# Altium PCB SDRdrum_Arty_RevB.PcbDoc
Units mm, origin at the board's own origin, x right, y up, seen from the top; angles counter-clockwise.
Board outline 100 x 90 mm, 4 copper layers (L1, L2 (GND), L3 (PWR), L4), stack 0.778 mm thick; 111 components, 58 nets, 399 pads, 48 vias.
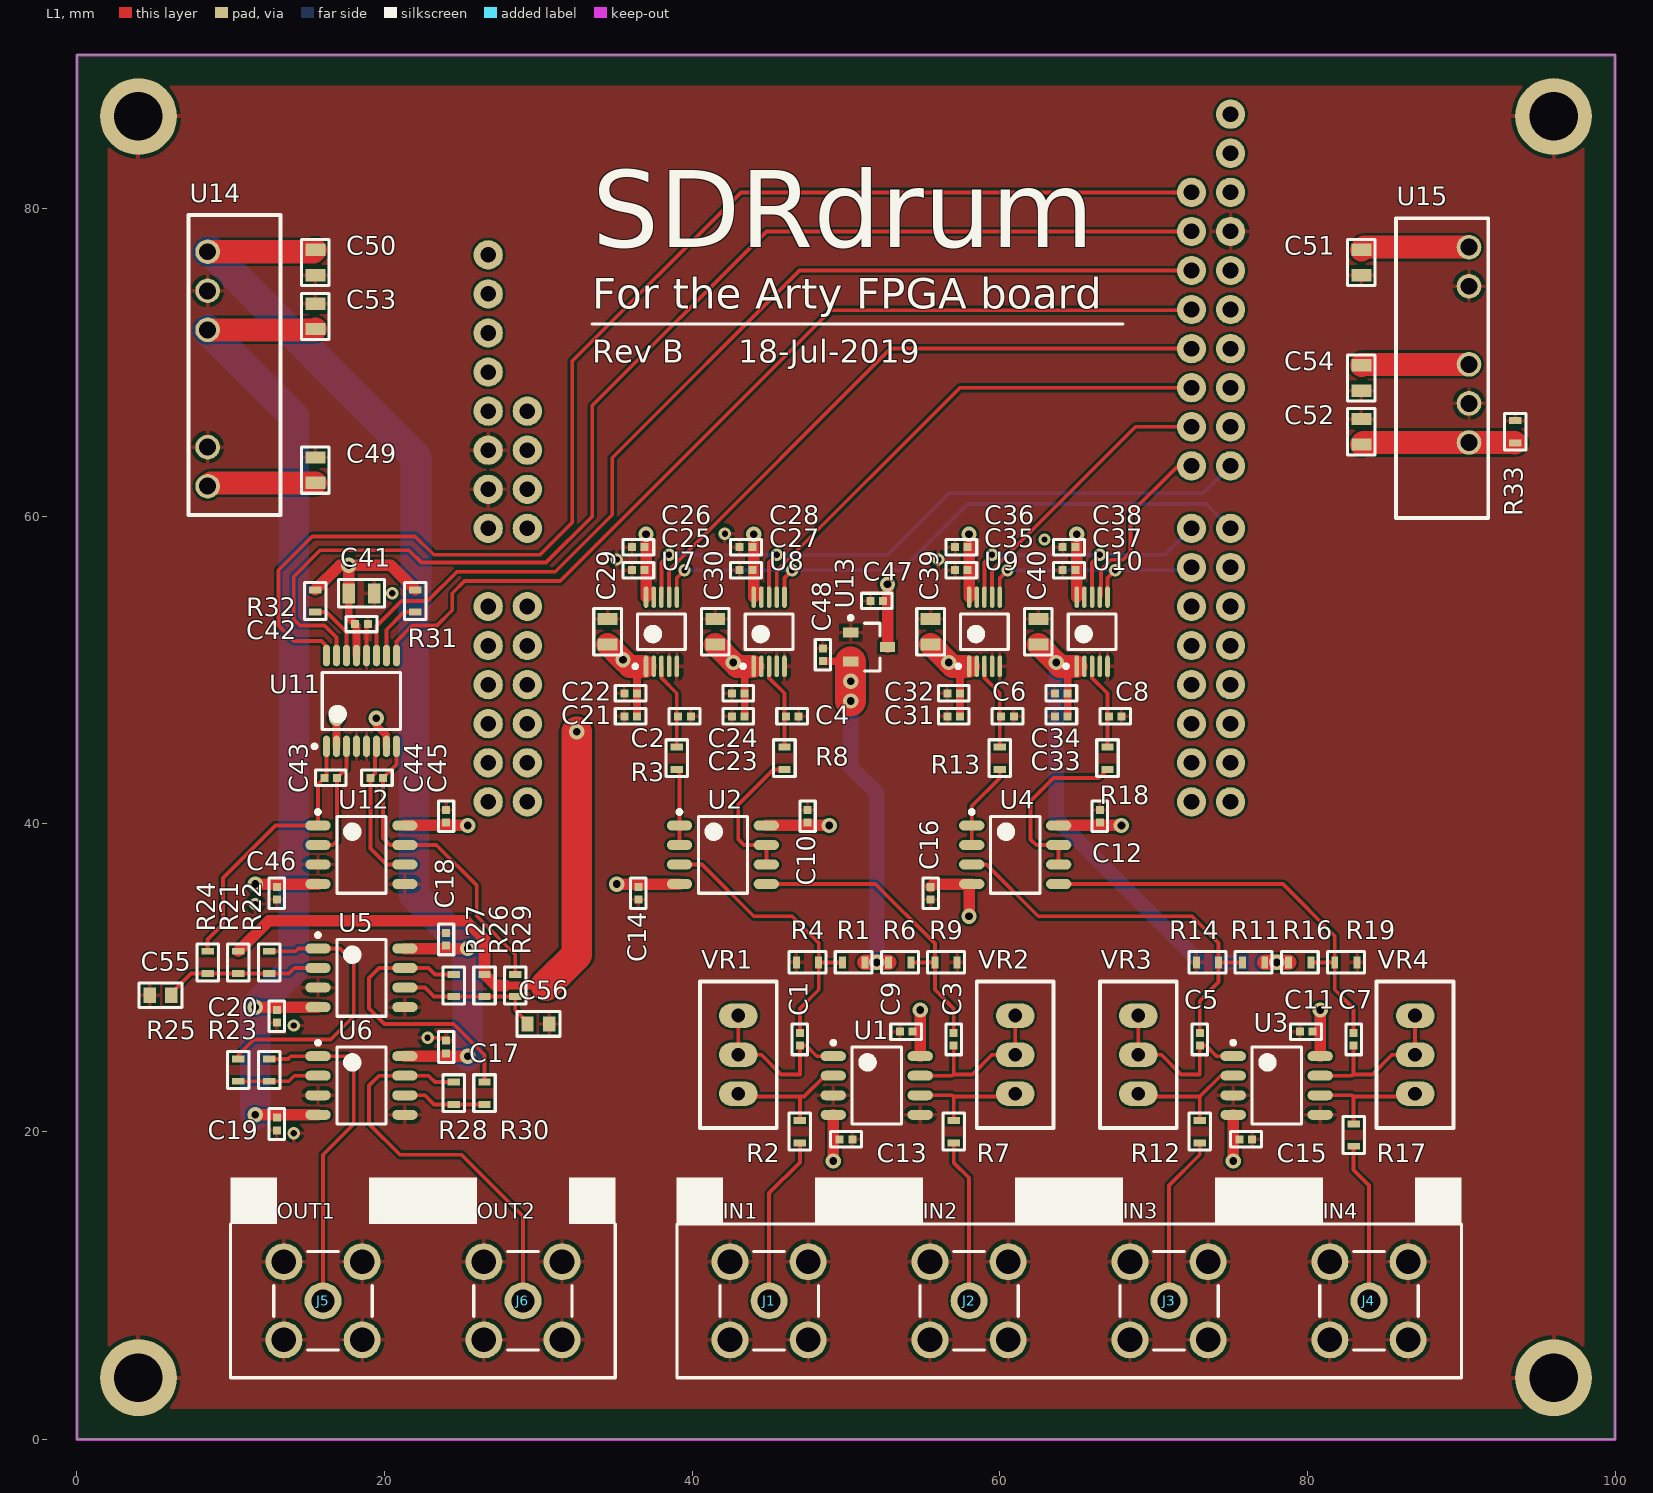
[diagram p0: L1 view]
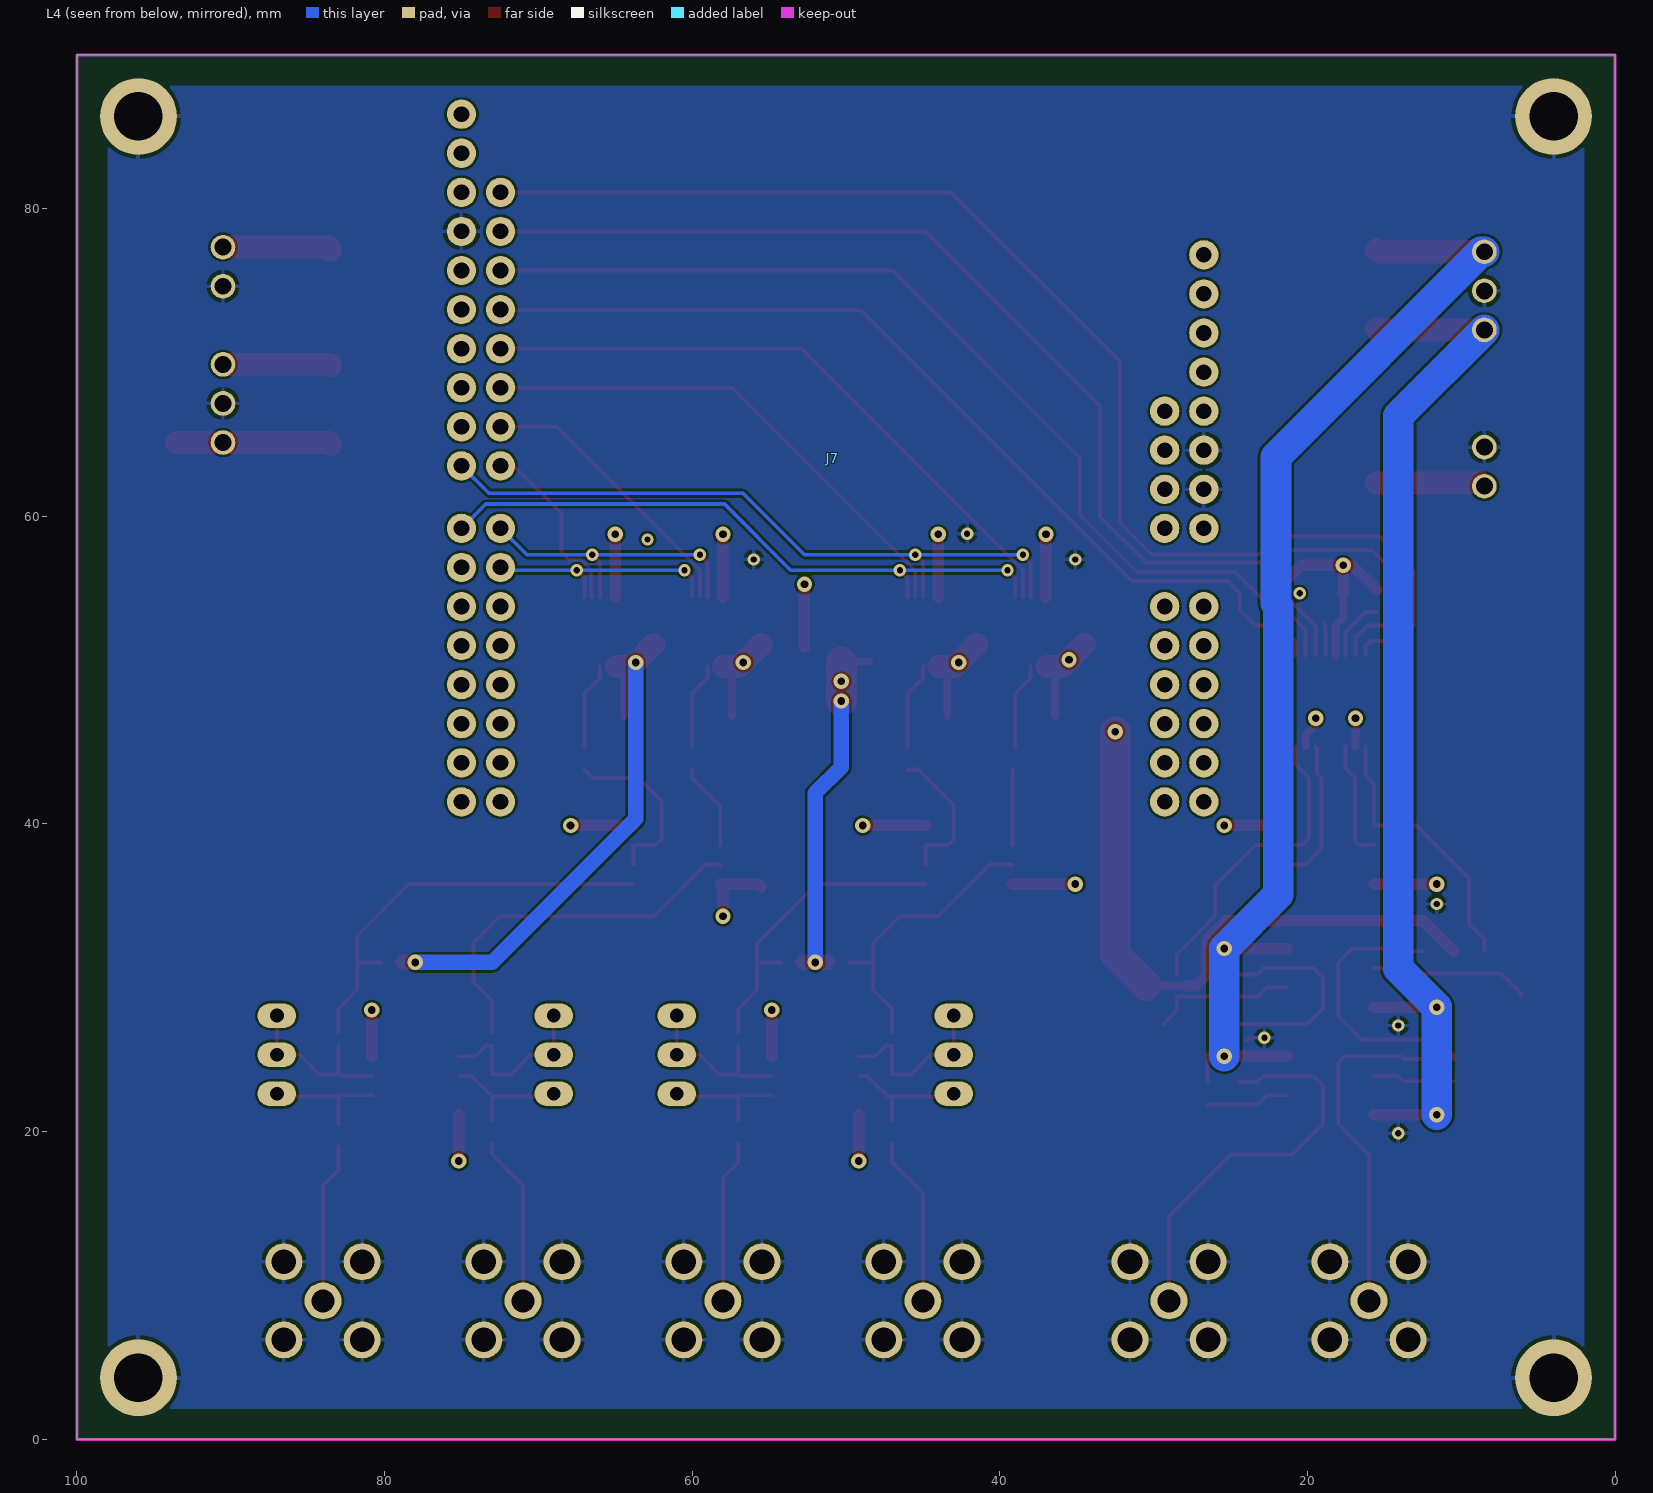
[diagram p1: L4 view, seen from below]
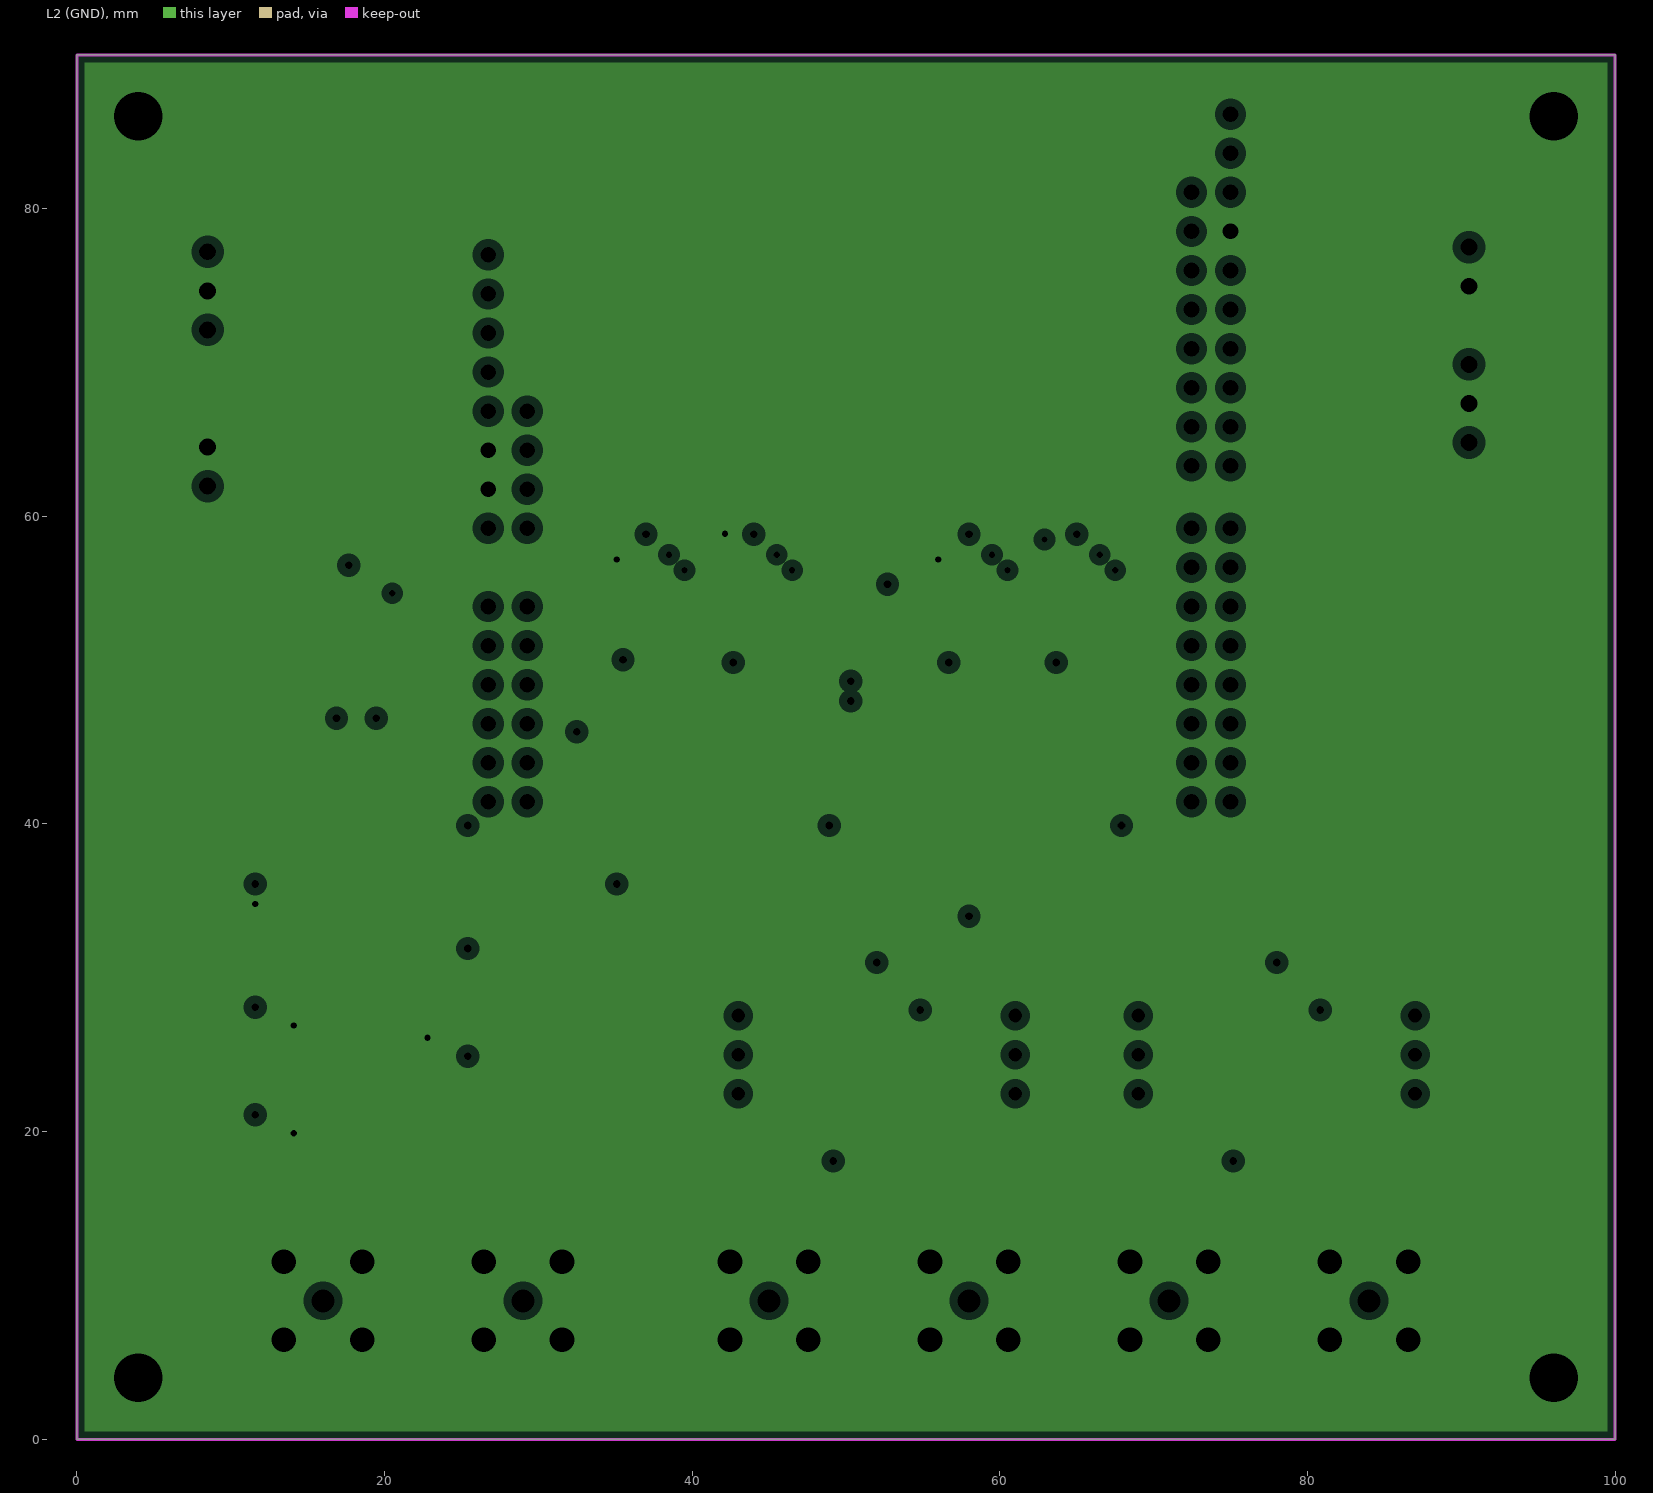
[diagram p2: L2 (GND), clearances drawn from the general rule]
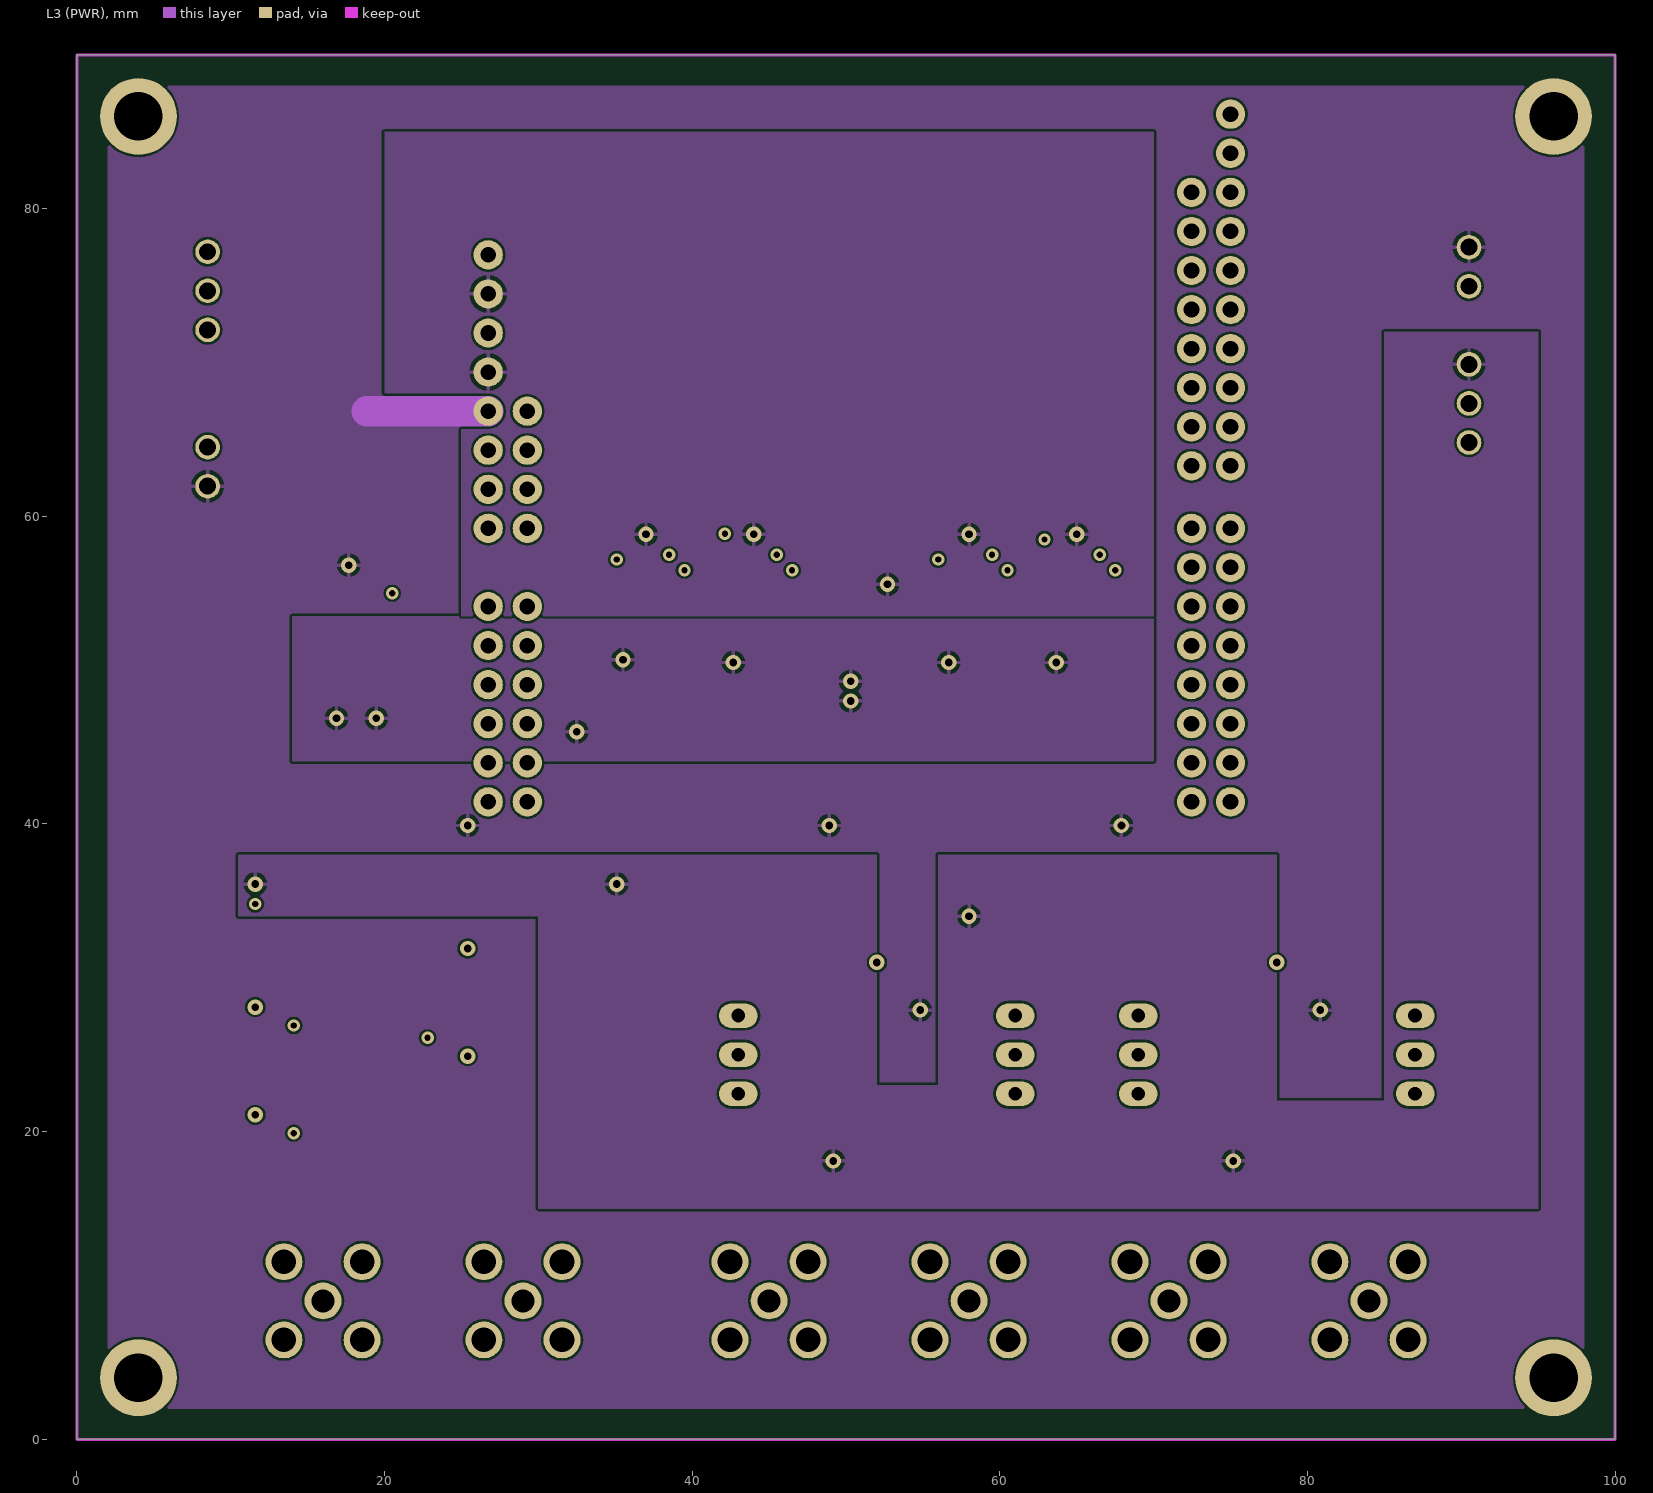
[diagram p3: L3 (PWR)]
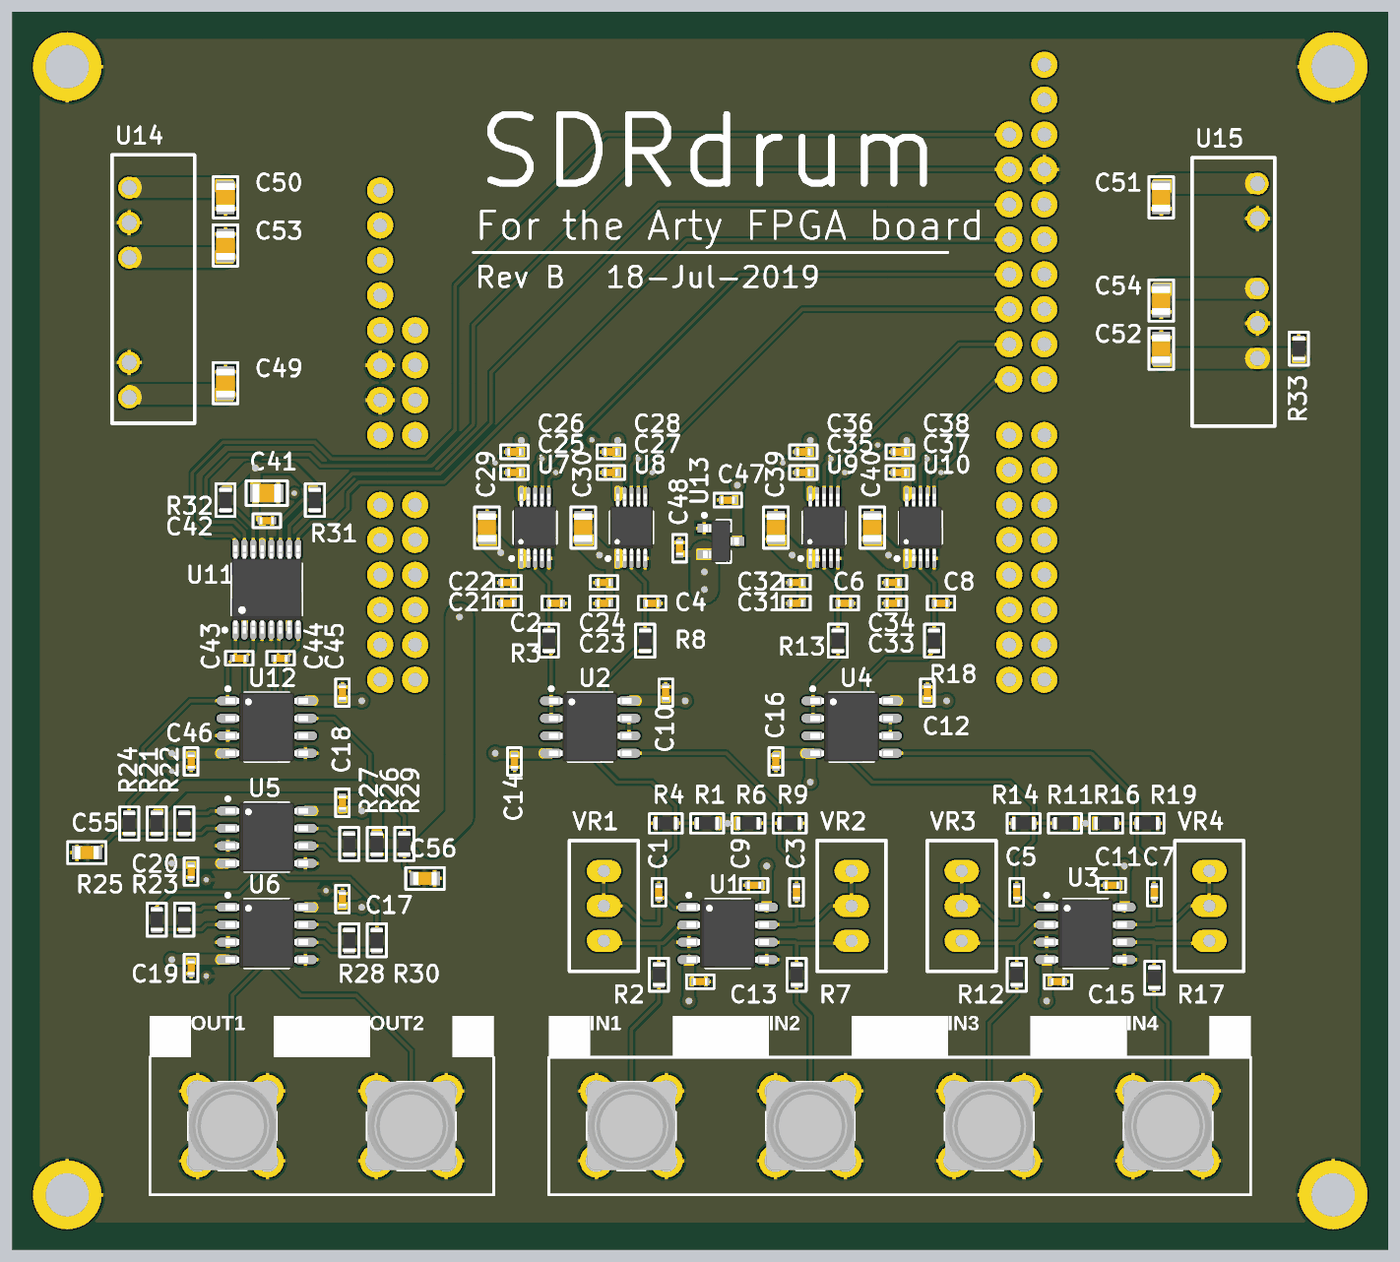
[diagram p4: 3D render of the assembled board from above, using the file's embedded part models]

## Layer stack, top to bottom
Top Solder: solder mask 0.0102, Solder Resist, Dk 3.5
L1: signal copper 0.0356
Dielectric 1: core 0.254, FR-4, Dk 4.2
L2 (GND): plane copper 0.036, net GND
Dielectric 3: core 0.254, Dk 4.2
L3 (PWR): signal copper 0.036
Dielectric 4: prepreg 0.127, Dk 4.2
L4: signal copper 0.0356
Bottom Solder: solder mask 0.0102, Solder Resist, Dk 3.5

## Board outline
0,0 100,0 100,90 0,90

## Design rules (kind name [scope] priority, off if disabled: settings)
Clearance [All] p1: gap=0.154 ignorepadtopadclearanceinfootprint=FALSE except(0: Arc-Hole Track-Hole SMDPad-Hole THPad-Hole Via-Hole Fill-Hole Poly-Hole Region-Hole Text-Hole)
Height [All] p1: minheight=0 maxheight=20 prefheight=12.7
HoleSize [All] p1: absolutevalues=TRUE maxlimit=4 minlimit=0.025 maxpercent=80.000 minpercent=20.000
MinimumSolderMaskSliver [All] p1: minsoldermaskwidth=0.05
PlaneClearance [All] p1: clearance=0.508
PlaneConnect [All] p1: planeconnectstyle=Relief reliefexpansion=0.508 reliefentries=4 reliefconductorwidth=0.254 reliefairgap=0.254
PolygonConnect [All] p1: connectstyle=Relief reliefconductorwidth=0.254 reliefentries=4 polygonreliefangle="90 Angle" airgapwidth=0.254
RoutingVias [All] p1: holewidth=0.711 width=1.27 viastyle="Through Hole" minholewidth=0.3 minwidth=0.6 maxholewidth=0.711 maxwidth=1.27
SilkToSilkClearance [All] p1: silktosilkclearance=0.1
SilkToSolderMaskClearance [IsPad] p1: minsilkscreentomaskgap=0.1 clearancetoexposedcopper=TRUE
SolderMaskExpansion [All] p1: expansion=0.102
Width [All] p1: maxlimit=2 minlimit=0.2 preferedwidth=0.254
23 further rules are at their usual default settings.

## Classes and differential pairs
component class ADCs: C21 C22 C23 C24 C25 C26 C27 C28 C29 C30 C31 C32 C33 C34 C35 C36 C37 C38 C39 C40 U7 U8 U9 U10
component class "Connectors and Mechanical": J7
component class DACs: C41 C42 C43 C44 C45 C46 R31 R32 U11 U12
component class Inputs: C1 C2 C3 C4 C5 C6 C7 C8 C9 C10 C11 C12 C13 C14 C15 C16 J1 J2 J3 J4 R1 R2 R3 R4 R6 R7 R8 R9 R11 R12 R13 R14 R16 R17 R18 R19 U1 U2 U3 U4 VR1 VR2 VR3 VR4
component class Outputs: C17 C18 C19 C20 C55 C56 J5 J6 R21 R22 R23 R24 R25 R26 R27 R28 R29 R30 U5 U6
component class Power: C47 C48 C49 C50 C51 C52 C53 C54 R33 U13 U14 U15

## Components (designator, comment, footprint, x,y, rotation, side; value= is the part's Value field where it differs from the comment)
C1 "Capacitor" CAP-0402-M 47,26 r90 top value=1µF
C2 "CAP 2200pF ±10% 25V 0402 X7R" CAP-0402-M 39.5,47 r180 top value=2200pF
C3 "Capacitor" CAP-0402-M 57,26 r90 top value=1µF
C4 "CAP 2200pF ±10% 25V 0402 X7R" CAP-0402-M 46.5,47 r180 top value=2200pF
C5 "Capacitor" CAP-0402-M 73,26 r90 top value=1µF
C6 "CAP 2200pF ±10% 25V 0402 X7R" CAP-0402-M 60.5,47 r180 top value=2200pF
C7 "Capacitor" CAP-0402-M 83,26 r90 top value=1µF
C8 "CAP 2200pF ±10% 25V 0402 X7R" CAP-0402-M 67.5,47 r180 top value=2200pF
C9 "Capacitor" CAP-0402-M 53.91,26.5 r180 top value=0.10µF
C10 "Capacitor" CAP-0402-M 47.5,40.5 r90 top value=0.10µF
C11 "Capacitor" CAP-0402-M 79.91,26.5 r180 top value=0.10µF
C12 "Capacitor" CAP-0402-M 66.5,40.5 r90 top value=0.10µF
C13 "Capacitor" CAP-0402-M 50,19.5 r0 top value=0.10µF
C14 "Capacitor" CAP-0402-M 36.5,35.5 r270 top value=0.10µF
C15 "Capacitor" CAP-0402-M 76,19.5 r0 top value=0.10µF
C16 "Capacitor" CAP-0402-M 55.5,35.5 r270 top value=0.10µF
C17 "Capacitor" CAP-0402-M 24,25.5 r90 top value=0.10µF
C18 "Capacitor" CAP-0402-M 24,32.5 r90 top value=0.10µF
C19 "Capacitor" CAP-0402-M 13,20.5 r270 top value=0.10µF
C20 "Capacitor" CAP-0402-M 13,27.5 r270 top value=0.10µF
C21 "Capacitor" CAP-0402-M 36,47 r180 top value=0.10µF
C22 "Capacitor" CAP-0402-M 36,48.5 r180 top value=1µF
C23 "Capacitor" CAP-0402-M 43,47 r180 top value=0.10µF
C24 "Capacitor" CAP-0402-M 43,48.5 r180 top value=1µF
C25 "Capacitor" CAP-0402-M 36.5,56.5 r180 top value=0.10µF
C26 "Capacitor" CAP-0402-M 36.5,58 r180 top value=1µF
C27 "Capacitor" CAP-0402-M 43.5,56.5 r180 top value=0.10µF
C28 "Capacitor" CAP-0402-M 43.5,58 r180 top value=1µF
C29 "Capacitor" CAP-0805-M 34.5,52.5 r270 top value=10µF
C30 "Capacitor" CAP-0805-M 41.5,52.5 r270 top value=10µF
C31 "Capacitor" CAP-0402-M 57,47 r180 top value=0.10µF
C32 "Capacitor" CAP-0402-M 57,48.5 r180 top value=1µF
C33 "Capacitor" CAP-0402-M 64,47 r180 top value=0.10µF
C34 "Capacitor" CAP-0402-M 64,48.5 r180 top value=1µF
C35 "Capacitor" CAP-0402-M 57.5,56.5 r180 top value=0.10µF
C36 "Capacitor" CAP-0402-M 57.5,58 r180 top value=1µF
C37 "Capacitor" CAP-0402-M 64.5,56.5 r180 top value=0.10µF
C38 "Capacitor" CAP-0402-M 64.5,58 r180 top value=1µF
C39 "Capacitor" CAP-0805-M 55.5,52.5 r270 top value=10µF
C40 "Capacitor" CAP-0805-M 62.5,52.5 r270 top value=10µF
C41 "Capacitor" CAP-0805-M 18.5,55 r180 top value=10µF
C42 "Capacitor" CAP-0402-M 18.5,53 r0 top value=0.10µF
C43 "CAP 6.8pF ±0.5pF 50V 0402 C0G, NP0" CAP-0402-M 16.5,43 r180 top value=6.8pF
C44 "CAP 6.8pF ±0.5pF 50V 0402 C0G, NP0" CAP-0402-M 19.5,43 r0 top value=6.8pF
C45 "Capacitor" CAP-0402-M 24,40.5 r90 top value=0.10µF
C46 "Capacitor" CAP-0402-M 13,35.5 r270 top value=0.10µF
C47 "Capacitor" CAP-0402-M 52,54.5 r180 top value=1µF
C48 "Capacitor" CAP-0402-M 48.5,51 r90 top value=1µF
C49 "Capacitor" CAP-0805-M 15.5,63 r270 top value=10µF
C50 "CAP 220nF ±10% 25V 0805 X7R" CAP-0805-M 15.5,76.5 r90 top value=220nF
C51 "Capacitor" CAP-0805-M 83.5,76.5 r90 top value=10µF
C52 "CAP 220nF ±10% 25V 0805 X7R" CAP-0805-M 83.5,65.5 r270 top value=220nF
C53 "CAP 220nF ±10% 25V 0805 X7R" CAP-0805-M 15.5,73 r270 top value=220nF
C54 "CAP 220nF ±10% 25V 0805 X7R" CAP-0805-M 83.5,69 r90 top value=220nF
C55 "CAP 100pF ±5% 50V 0603 C0G, NP0" CAP-0603-M 5.427,28.873 r0 top value=100pF
C56 "CAP 100pF ±5% 50V 0603 C0G, NP0" CAP-0603-M 30,27 r180 top value=100pF
J1 "5-1814832-1" 5-1814832-1 45,9 r0 top
J2 "5-1814832-1" 5-1814832-1 58,9 r0 top
J3 "5-1814832-1" 5-1814832-1 71,9 r0 top
J4 "5-1814832-1" 5-1814832-1 84,9 r0 top
J5 "5-1814832-1" 5-1814832-1 16,9 r0 top
J6 "5-1814832-1" 5-1814832-1 29,9 r0 top
J7 "ARTY" ARTY-TH 93,34 r270 bottom locked
R1 "RES 10K 1% 1/10 W 0603 ±100ppm/°C" RES-0603-M 50.5,31 r0 top value=10K
R2 "Resistor" RES-0603-M 47,20 r270 top value=1K
R3 "RES 330R 1% 1/10 W 0603 ±100ppm/°C" RES-0603-M 39,44.275 r90 top value=330R
R4 "RES 10K 1% 1/10 W 0603 ±100ppm/°C" RES-0603-M 47.5,31 r0 top value=10K
R6 "RES 10K 1% 1/10 W 0603 ±100ppm/°C" RES-0603-M 53.5,31 r180 top value=10K
R7 "Resistor" RES-0603-M 57,20 r270 top value=1K
R8 "RES 330R 1% 1/10 W 0603 ±100ppm/°C" RES-0603-M 46,44.275 r90 top value=330R
R9 "RES 10K 1% 1/10 W 0603 ±100ppm/°C" RES-0603-M 56.5,31 r180 top value=10K
R11 "RES 10K 1% 1/10 W 0603 ±100ppm/°C" RES-0603-M 76.5,31 r0 top value=10K
R12 "Resistor" RES-0603-M 73,20 r270 top value=1K
R13 "RES 330R 1% 1/10 W 0603 ±100ppm/°C" RES-0603-M 60,44.275 r90 top value=330R
R14 "RES 10K 1% 1/10 W 0603 ±100ppm/°C" RES-0603-M 73.5,31 r0 top value=10K
R16 "RES 10K 1% 1/10 W 0603 ±100ppm/°C" RES-0603-M 79.5,31 r180 top value=10K
R17 "Resistor" RES-0603-M 83,19.775 r270 top value=1K
R18 "RES 330R 1% 1/10 W 0603 ±100ppm/°C" RES-0603-M 67,44.275 r90 top value=330R
R19 "RES 10K 1% 1/10 W 0603 ±100ppm/°C" RES-0603-M 82.5,31 r180 top value=10K
R21 "RES 10K 1% 1/10 W 0603 ±100ppm/°C" RES-0603-M 10.5,31 r90 top value=10K
R22 "RES 10K 1% 1/10 W 0603 ±100ppm/°C" RES-0603-M 12.5,31 r90 top value=10K
R23 "RES 4K02 1% 1/10 W 0603 ±100ppm/°C" RES-0603-M 12.5,24 r90 top value=4K02
R24 "RES 4K99 1% 1/10 W 0603 ±100ppm/°C" RES-0603-M 8.5,31 r270 top value=4K99
R25 "RES 1K 1% 1/10 W 0603 ±100ppm/°C" RES-0603-M 10.5,24 r270 top value=1K
R26 "RES 10K 1% 1/10 W 0603 ±100ppm/°C" RES-0603-M 26.5,29.5 r90 top value=10K
R27 "RES 10K 1% 1/10 W 0603 ±100ppm/°C" RES-0603-M 24.5,29.5 r90 top value=10K
R28 "RES 4K02 1% 1/10 W 0603 ±100ppm/°C" RES-0603-M 24.5,22.5 r90 top value=4K02
R29 "RES 4K99 1% 1/10 W 0603 ±100ppm/°C" RES-0603-M 28.5,29.5 r270 top value=4K99
R30 "RES 1K 1% 1/10 W 0603 ±100ppm/°C" RES-0603-M 26.5,22.5 r270 top value=1K
R31 "Resistor" RES-0603-M 22,54.5 r270 top value=1K
R32 "Resistor" RES-0603-M 15.5,54.5 r270 top value=1K
R33 "RES 499R 1% 1/10 W 0603 ±100ppm/°C" RES-0603-M 93.5,65.5 r90 top value=499R
U1 "TLC082" SOIC127P600X175-8M 52,23 r0 top
U2 "TLC082" SOIC127P600X175-8M 42,38 r0 top
U3 "TLC082" SOIC127P600X175-8M 78,23 r0 top
U4 "TLC082" SOIC127P600X175-8M 61,38 r0 top
U5 "TLC082" SOIC127P600X175-8M 18.5,30 r0 top
U6 "TLC082" SOIC127P600X175-8M 18.5,23 r0 top
U7 "AD7980ARMZ" TSSOP50P490X110-10N 38,52.5 r90 top
U8 "AD7980ARMZ" TSSOP50P490X110-10N 45,52.5 r90 top
U9 "AD7980ARMZ" TSSOP50P490X110-10N 59,52.5 r90 top
U10 "AD7980ARMZ" TSSOP50P490X110-10N 66,52.5 r90 top
U11 "AD5545" TSOP65P640X120-16N 18.5,48 r90 top
U12 "LT1678" SOIC127P600X175-8M 18.5,38 r0 top
U13 "MCP1700T-2502E/TT" SOT65P237X110-3N 51.5,51.5 r0 top
U14 "CMR0515S3C" CMR-3C 8.5,61.96 r90 top
U15 "PDM1-S5-D5-S" PDM-1S 90.5,77.5 r270 top
VR1 "PV36W204C01B00" PV36W 43,25 r90 top value=200k
VR2 "PV36W204C01B00" PV36W 61,25 r90 top value=200k
VR3 "PV36W204C01B00" PV36W 69,25 r90 top value=200k
VR4 "PV36W204C01B00" PV36W 87,25 r90 top value=200k

## Footprints (in the part's own frame and the unit in brackets; to place one, negate y for a bottom-side part, rotate by r counter-clockwise, add the part's x,y. Pads: shape width x height; smd on the part's side, far side on the other; paste and mask are expansions set on the pad)
5-1814832-1 [mm]
  round 2.4 hole 1.5: 1(0,0)
  round 2.4 hole 1.6: MH(-2.54,-2.54) MH(-2.54,2.54) MH(2.54,-2.54) MH(2.54,2.54)
  silkscreen extent -3.2,-3.2 3.2,3.2, body extent -3.2,-3.2 3.2,3.2, height 9.5
ARTY-TH [mm]
  round 1.905 hole 1.016: 1(-43,66.26) 2(-40.46,66.26) 3(-37.92,66.26) 4(-35.38,66.26) 5(-32.84,66.26) 6(-30.3,66.26) 7(-27.76,66.26) 8(-25.22,66.26) 9(-20.14,66.26) 10(-17.6,66.26) 11(-15.06,66.26) 12(-12.52,66.26) 13(-9.98,66.26) 14(-7.44,66.26) 15(-32.84,63.72) 16(-30.3,63.72) 17(-27.76,63.72) 18(-25.22,63.72) 19(-20.14,63.72) 20(-17.6,63.72) 21(-15.06,63.72) 22(-12.52,63.72) 23(-9.98,63.72) 24(-7.44,63.72) 25(-47.064,20.54) 26(-44.524,20.54) 27(-41.984,20.54) 28(-39.444,20.54) 29(-36.904,20.54) 30(-34.364,20.54) 31(-31.824,20.54) 32(-29.284,20.54) 33(-25.22,20.54) 34(-22.68,20.54) 35(-20.14,20.54) 36(-17.6,20.54) 37(-15.06,20.54) 38(-12.52,20.54) 39(-9.98,20.54) 40(-7.44,20.54) 41(-52.144,18) 42(-49.604,18) 43(-47.064,18) 44(-44.524,18) 45(-41.984,18) 46(-39.444,18) 47(-36.904,18) 48(-34.364,18) 49(-31.824,18) 50(-29.284,18) 51(-25.22,18) 52(-22.68,18) 53(-20.14,18) 54(-17.6,18) 55(-15.06,18) 56(-12.52,18) 57(-9.98,18) 58(-7.44,18)
CAP-0402-M [mm] "Chip Capacitor, 2-Leads, Body 1.00x0.50mm, IPC High Density"
  rect 0.52x0.52 smd: 1(-0.41,0) 2(0.41,0)
  silkscreen extent -1,-0.5 1,0.5, body extent -0.53,-0.28 0.53,0.28, height 0.55
CAP-0603-M [mm] "Chip Capacitor, 2-Leads, Body 1.60x0.80mm, IPC Medium Density"
  rect 0.8x1 smd: 1(-0.7,0) 2(0.7,0)
  silkscreen extent -1.4,-0.8 1.4,0.8, body extent -0.87,-0.48 0.87,0.48, height 0.9
CAP-0805-M [mm] "Chip Capacitor, 2-Leads, Body 2.00x1.25mm, IPC High Density"
  rect 0.8x1.3 smd: 1(-0.825,0) 2(0.825,0)
  silkscreen extent -1.5,-0.9 1.5,0.9, body extent -1.05,-0.67 1.05,0.67, height 1.35
CMR-3C [mm]
  round 1.6 hole 1.1: 1(0,0) 2(2.54,0) 3(10.16,0) 4(12.7,0) 5(15.24,0)
  silkscreen extent -1.88,-4.75 17.62,1.25, body extent -2,-4.75 17.62,1.25, height 10
PDM-1S [mm]
  round 1.6 hole 1.1: 1(0,0) 2(2.54,0) 3(7.62,0) 4(10.16,0) 5(12.7,0)
  silkscreen extent -1.88,-4.75 17.62,1.25, body extent -2,-4.75 17.62,1.25, height 10
PV36W [mm]
  oval 1.6x2.5 hole 0.9: 1(-2.54,0) 2(0,0) 3(2.54,0)
  silkscreen extent -4.75,-2.5 4.75,2.5, body extent -4.75,-2.5 4.75,2.5, height 10
RES-0603-M [mm] "Chip Resistor, 2-Leads, Body 1.60x0.80mm, IPC High Density"
  rect 0.45x0.8 smd: 1(-0.725,0) 2(0.725,0)
  silkscreen extent -1.2,-0.7 1.2,0.7, body extent -0.85,-0.45 0.85,0.45, height 0.55
SOIC127P600X175-8M [mm] "SOIC, 8-Leads, Body 4.90x3.90mm, Pitch 1.27mm, IPC Low Density"
  oval 1.65x0.65 smd: 1(-2.825,1.905) 2(-2.825,0.635) 3(-2.825,-0.635) 4(-2.825,-1.905) 5(2.825,-1.905) 6(2.825,-0.635) 7(2.825,0.635) 8(2.825,1.905)
  silkscreen extent -2.95,-2.5 1.6,2.9, body extent -3,-2.5 3,2.5, height 1.75
SOT65P237X110-3N [mm] "SOT23, 3-Leads, Body 2.86x2.37mm, Pitch 0.65mm, IPC Medium Density"
  rect 1x0.65 smd: 1(-1.2,0.95) 2(-1.2,-0.95) 3(1.2,0)
  silkscreen extent -1.32,-1.55 0.7,2.02, body extent -1.32,-1.53 1.32,1.53, height 1.1
TSOP65P640X120-16N [mm] "TSOP, 16-Leads, Body 5.00x4.40mm, Pitch 0.65mm, IPC Medium Density"
  oval 1.4x0.45 smd: 1(-2.95,2.275) 2(-2.95,1.625) 3(-2.95,0.975) 4(-2.95,0.325) 5(-2.95,-0.325) 6(-2.95,-0.975) 7(-2.95,-1.625) 8(-2.95,-2.275) 9(2.95,-2.275) 10(2.95,-1.625) 11(2.95,-0.975) 12(2.95,-0.325) 13(2.95,0.325) 14(2.95,0.975) 15(2.95,1.625) 16(2.95,2.275)
  silkscreen extent -3.07,-2.55 1.85,3.17, body extent -3.2,-2.55 3.2,2.55, height 1.2
TSSOP50P490X110-10N [mm] "TSSOP, 10-Leads, Body 3.00x3.00mm, Pitch 0.50mm, IPC Medium Density"
  oval 1.4x0.3 smd: 1(-2.25,1) 2(-2.25,0.5) 3(-2.25,0) 4(-2.25,-0.5) 5(-2.25,-1) 6(2.25,-1) 7(2.25,-0.5) 8(2.25,0) 9(2.25,0.5) 10(2.25,1)
  silkscreen extent -2.37,-1.55 1.15,1.82, body extent -2.45,-1.55 2.45,1.55, height 1.1

## Part data
C1 C3 C5 C7 C22 C24 C26 C28 C32 C34 C36 C38 C47 C48: library part CC0402KRX5R6BB105, Manufacturer=Yageo, Manufacturer Series=CC, Package=0402, Supplier Part Number 1=311-1439-1-ND, Temperature Coefficient=X5R, Temperature Range="-55°C ~ 85°C", Tolerance=±10%, Voltage=10V, Component Type=Standard, Part Number=CC0402KRX5R6BB105, Supplier 1=Digi-Key
C2 C4 C6 C8: library part CC0402KRX7R8BB222, Manufacturer=Yageo, Manufacturer Series=CC, Package=0402, Supplier Part Number 1=311-1714-1-ND, Temperature Coefficient=X7R, Temperature Range="-55°C ~ 125°C", Tolerance=±10%, Voltage=25V, Component Type=Standard, Part Number=CC0402KRX7R8BB222, Supplier 1=Digi-Key
C9 C10 C11 C12 C13 C14 C15 C16 C17 C18 C19 C20 C21 C23 C25 C27 C31 C33 C35 C37 C42 C45 C46: library part CC0402KRX5R6BB104, Manufacturer=Yageo, Manufacturer Series=CC, Package=0402, Supplier Part Number 1=311-1336-1-ND, Temperature Coefficient=X5R, Temperature Range="-55°C ~ 85°C", Tolerance=±10%, Voltage=10V, Component Type=Standard, Part Number=CC0402KRX5R6BB104, Supplier 1=Digi-Key
C29 C30 C39 C40 C41 C49 C51: library part CC0805KKX5R6BB106, Manufacturer=Yageo, Manufacturer Series=CC, Package=0805, Supplier Part Number 1=311-1460-1-ND, Temperature Coefficient=X5R, Temperature Range="-55°C ~ 85°C", Tolerance=±10%, Voltage=10V, Component Type=Standard, Part Number=CC0805KKX5R6BB106, Supplier 1=Digi-Key
C43 C44: library part CC0402DRNPO9BN6R8, Manufacturer=Yageo, Manufacturer Series=CC, Package=0402, Supplier Part Number 1=311-1637-1-ND, Temperature Coefficient="C0G, NP0", Temperature Range="-55°C ~ 125°C", Tolerance=±0.5pF, Voltage=50V, Component Type=Standard, Part Number=CC0402DRNPO9BN6R8, Supplier 1=Digi-Key
C50 C52 C53 C54: library part CC0805KRX7R8BB224, Manufacturer=Yageo, Manufacturer Series=CC, Package=0805, Supplier Part Number 1=311-1432-1-ND, Temperature Coefficient=X7R, Temperature Range="-55°C ~ 125°C", Tolerance=±10%, Voltage=25V, Component Type=Standard, Part Number=CC0805KRX7R8BB224, Supplier 1=Digi-Key
C55 C56: library part CC0603JRNPO9BN101, Manufacturer=Yageo, Manufacturer Series=CC, Package=0603, Supplier Part Number 1=311-1069-1-ND, Temperature Coefficient="C0G, NP0", Temperature Range="-55°C ~ 125°C", Tolerance=±5%, Voltage=50V, Component Type=Standard, Part Number=CC0603JRNPO9BN101, Supplier 1=Digi-Key
R1 R4 R6 R9 R11 R14 R16 R19 R21 R22 R26 R27: library part RC0603FR-0710KL, Manufacturer=Yageo, Manufacturer Series=RC, Package=0603, Power="1/10 W", Supplier Part Number 1=311-10.0KHRCT-ND, Temperature Coefficient=±100ppm/°C, Temperature Range="-55°C ~ 155°C", Tolerance=1%, Component Type=Standard, Part Number=RC0603FR-0710KL, Supplier 1=Digi-Key
R2 R7 R12 R17 R25 R30 R31 R32: library part RC0603FR-071KL, Manufacturer=Yageo, Manufacturer Series=RC, Package=0603, Power="1/10 W", Supplier Part Number 1=311-1.00KHRCT-ND, Temperature Coefficient=±100ppm/°C, Temperature Range="-55°C ~ 155°C", Tolerance=1%, Component Type=Standard, Part Number=RC0603FR-071KL, Supplier 1=Digi-Key
R3 R8 R13 R18: library part RC0603FR-07330RL, Manufacturer=Yageo, Manufacturer Series=RC, Package=0603, Power="1/10 W", Supplier Part Number 1=311-330HRCT-ND, Temperature Coefficient=±100ppm/°C, Temperature Range="-55°C ~ 155°C", Tolerance=1%, Component Type=Standard, Part Number=RC0603FR-07330RL, Supplier 1=Digi-Key
R23 R28: library part RC0603FR-074K02L, Manufacturer=Yageo, Manufacturer Series=RC, Package=0603, Power="1/10 W", Supplier Part Number 1=311-4.02KHRCT-ND, Temperature Coefficient=±100ppm/°C, Temperature Range="-55°C ~ 155°C", Tolerance=1%, Component Type=Standard, Part Number=RC0603FR-074K02L, Supplier 1=Digi-Key
R24 R29: library part RC0603FR-074K99L, Manufacturer=Yageo, Manufacturer Series=RC, Package=0603, Power="1/10 W", Supplier Part Number 1=311-4.99KHRCT-ND, Temperature Coefficient=±100ppm/°C, Temperature Range="-55°C ~ 155°C", Tolerance=1%, Component Type=Standard, Part Number=RC0603FR-074K99L, Supplier 1=Digi-Key
R33: library part RC0603FR-07499RL, Manufacturer=Yageo, Manufacturer Series=RC, Package=0603, Power="1/10 W", Supplier Part Number 1=311-499HRCT-ND, Temperature Coefficient=±100ppm/°C, Temperature Range="-55°C ~ 155°C", Tolerance=1%, Component Type=Standard, Part Number=RC0603FR-07499RL, Supplier 1=Digi-Key
U1 U2 U3 U4 U5 U6: "36-V, PrOperational Amplifiers, 8-Pin SOIC"
U11: "Dual, Current-Output, Serial-Input, 16-Bit DAC, 16-Pin TSSOP", Supplier Part Number 1=AD5545BRUZ-ND, Supplier 1=Digi-Key
U12: "Dual/Quad Low Noise, Rail-to-Rail, Precision Op Amps, 8-Pin SOIC", Supplier Part Number 1=LT1678CS8#PBF-ND, Supplier 1=Digi-Key
U13: Supplier Part Number 1=MCP1700T-2502E/TTCT-ND, Supplier 1=Digi-Key
U14: Supplier Part Number 1=811-2900-5-ND, Supplier 1=Digi-Key
VR1 VR2 VR3 VR4: "Potentiometer, 200 k, 10%, 0.5 W, Through Hole", Supplier Part Number 1=490-2882-ND, Supplier 1=Digi-Key

## Free pads (board coordinates)
  round 5 hole 3.15: 0(4,4) 0(4,86) 0(96,4) 0(96,86)

## Via types
v1: diameter 1, hole 0.5, L1 to L4, tented both sides, 31 vias
v2: diameter 0.8, hole 0.4, L1 to L4, tented both sides, 17 vias

## Nets (pads, with @x,y where several pads share a name; then routed paths per layer and width w, separated by ;. In a path a pad name is that pad's centre, name@x,y a point inside that pad or via, vN(x,y) a via of type N, cw(c..) or ccw(c..) an arc to the next point about the centre after c; other vN are vias at no path point)
+2V5: C21.1 C22.1 C23.1 C24.1 C29.2 C30.2 C31.1 C32.1 C33.1 C34.1 C39.2 C40.2 C48.1 R1.2 R6.2 R11.2 R16.2 R21.2 R26.2 U7.1 U7.2 U8.1 U8.2 U9.1 U9.2 U10.1 U10.2 U11.2 U11.7 U13.2 | length 123.3
  L1 w0.5: U11.2 v1(16.875,46.875) ; v1(19.465,46.875) 19.465,46.424 20.104,45.786 20.104,45.071 U11.7 ; 27.852,29.5 30.5,29.5 ; 35.925,50.25 36.41,49.765 C21.1 ; C23.1 43.41,50 ; C48.1 50.26,50.59 U13.2 ; C31.1 C32.1 57.41,50 ; C33.1 C34.1 64.41,50
  L1 w0.75: R21.2 12.474,33.699 25.301,33.699 26.5,32.5 R26.2 27.225,29.5 27.852,29.5
  L1 w1: R1.2 v1(52,31) R6.2 ; R11.2 v1(78,31) R16.2
  L1 w1.5: C29.2 v1(35.5,50.675) 35.925,50.25 U7.1@36.946,50.25 ; C30.2 v1(42.675,50.5) 42.925,50.25 U8.1@43.946,50.25 ; C39.2 v1(56.675,50.5) 56.925,50.25 U9.1@57.946,50.25 ; C40.2 v1(63.675,50.5) 63.925,50.25 U10.1@64.946,50.25
  L1 w2: 30.5,29.5 32.5,31.5 v1(32.5,46) ; v1(50.3,48) v1(50.3,49.275) U13.2
  L4 w1: v1(50.3,48) 50.3,43.7 52,42 v1(52,31) ; v1(63.675,50.5) 63.675,40.325 73,31 v1(78,31)
+3V3: C25.1 C26.1 C27.1 C28.1 C35.1 C36.1 C37.1 C38.1 C47.1 J7.2 J7.4 U7.9 U7.10 U8.9 U8.10 U9.9 U9.10 U10.9 U10.10 U13.3 | length 20.4
  L1 w0.75: U7.10 37,58 v1(37,58.83) ; U8.10 44,58 v1(44,58.83) ; U13.3 v1(52.7,55.58) ; U9.10 v1(58,58.83) ; U10.10 v1(65,58.83)
+5V: C9.1 C10.1 C11.1 C12.1 C41.2 C42.1 C45.1 C49.2 C51.2 J7.5 R31.1 R32.1 U1.8 U2.8 U3.8 U4.8 U11.13 U12.8 U14.1 U15.1 | length 54.2
  L1 w0.5: C41.2 17.675,53.415 C42.1 18.175,52.915 U11.13
  L1 w0.75: R32.1 17.1,56.825 v1(17.675,56.825) ; C41.2 v1(17.675,56.825) ; U12.8 v1(25.405,39.905) ; R31.1 20.4,56.825 v1(17.675,56.825) ; U2.8 v1(48.905,39.905) ; U1.8 v1(54.825,27.905) ; U4.8 v1(67.905,39.905) ; U3.8 v1(80.825,27.905)
  L1 w1.5: U14.1 8.715,62.175 C49.2 ; C51.2 83.675,77.5 U15.1
  L3 (PWR) w2: 18.84,66.84 J7.5
+15V: C17.1 C18.1 C50.2 U5.8 U6.8 U14.5 | length 74.8
  L1 w0.75: U6.8 v1(25.405,24.905) ; U5.8 v1(25.405,31.905)
  L1 w1.5: U14.5 15.375,77.2 C50.2
  L4 w2: U14.5 8.723,77.2 22.054,63.869 22.054,54.356 21.9,54.202 21.9,35.41 v1(25.405,31.905) v1(25.405,24.905)
-5V: C13.1 C14.1 C15.1 C16.1 C46.1 C54.2 U1.4 U2.4 U3.4 U4.4 U12.4 U15.3 | length 26.1
  L1 w0.75: v1(11.595,36.095) U12.4 ; v1(35.095,36.095) U2.4 ; v1(49.175,18.095) U1.4 ; C16.1 55.685,36.095 U4.4 58,35.92 v1(58,34) ; v1(75.175,18.095) U3.4
  L1 w1.5: C54.2 83.555,69.88 U15.3
-15V: C19.1 C20.1 C53.2 U5.4 U6.4 U14.3 | length 69.6
  L1 w0.75: v1(11.595,21.095) U6.4 ; v1(11.595,28.095) U5.4
  L1 w1.5: U14.3 15.445,72.12 C53.2
  L4 w2: U14.3 14.1,66.52 14.1,30.6 v1(11.595,28.095) v1(11.595,21.095)
ADC_A_DATA: J7.29 U7.7 | length 41.7
  L1 w0.25: U7.7 38.5,56.5 52.904,70.904 J7.29
ADC_A_IN: C2.2 R3.2 U7.3 | length 5.7
  L1 w0.25: U7.3 38,49.5 39,48.5 R3.2
ADC_AB_CLK: J7.50 U7.8 U8.8 | length 44.8
  L1 w0.25: U7.8 38,57 v2(38.5,57.5) ; U8.8 45,57 v2(45.5,57.5)
  L4 w0.25: v2(38.5,57.5) v2(45.5,57.5) 52.7,57.5 56.7,61.5 73.216,61.5 J7.50
ADC_AB_CNV: J7.51 U7.6 U8.6 | length 41.8
  L1 w0.25: U7.6 39,56 v2(39.5,56.5) ; U8.6 46,56 v2(46.5,56.5)
  L4 w0.25: v2(39.5,56.5) v2(46.5,56.5) 53.6,56.5 57.9,60.8 73.42,60.8 J7.51
ADC_B_DATA: J7.30 U8.7 | length 33.6
  L1 w0.25: U8.7 45.5,56.46 57.404,68.364 J7.30
ADC_B_IN: C4.2 R8.2 U8.3 | length 5.7
  L1 w0.25: U8.3 45,49.5 46,48.5 R8.2
ADC_C_DATA: J7.31 U9.7 | length 18.6
  L1 w0.25: U9.7 59.5,56.5 68.824,65.824 J7.31
ADC_C_IN: C6.2 R13.2 U9.3 | length 5.7
  L1 w0.25: U9.3 59,49.5 60,48.5 R13.2
ADC_CD_CLK: J7.33 U9.8 U10.8 | length 19.6
  L1 w0.25: U9.8 59,57 v2(59.5,57.5) ; U10.8 66,57 v2(66.5,57.5)
  L4 w0.25: v2(59.5,57.5) v2(66.5,57.5) 70.74,57.5 J7.33
ADC_CD_CNV: J7.34 U9.6 U10.6 | length 15.9
  L1 w0.25: U9.6 60,56 v2(60.5,56.5) ; U10.6 67,56 v2(67.5,56.5)
  L4 w0.25: v2(60.5,56.5) v2(67.5,56.5) 72.28,56.5 J7.34
ADC_D_DATA: J7.32 U10.7 | length 12
  L1 w0.25: U10.7 66.571,54.821 66.571,56.531 67.219,57.179 67.997,57.179 68.5,57.682 68.5,60.2 71.584,63.284 J7.32
ADC_D_IN: C8.2 R18.2 U10.3 | length 5.7
  L1 w0.25: U10.3 66,49.5 67,48.5 R18.2
CRNR_IN1: J1.1 R2.2 | length 11.1
  L1 w0.25: J1.1 45,16 47,18 R2.2
CRNR_IN2: J2.1 R7.2 | length 10.7
  L1 w0.25: R7.2 57,18 58,17 J2.1
CRNR_IN3: J3.1 R12.2 | length 11.1
  L1 w0.25: J3.1 71,16.5 73,18.5 R12.2
CRNR_IN4: J4.1 R17.2 | length 10.5
  L1 w0.25: R17.2 83,17.5 84,16.5 J4.1
DAC_CLK: J7.25 U11.16 | length 84.6
  L1 w0.25: U11.16 16.225,51.575 15.9,51.9 14.1,51.9 13.1,52.9 13.1,56.5 15.3,58.7 22,58.7 23.2,57.5 30.1,57.5 32.2,59.6 32.2,70.1 43.164,81.064 J7.25
DAC_CS: J7.27 U11.11 | length 66.7
  L1 w0.25: U11.11 19.475,52.875 21.1,54.5 22.8,54.5 24.7,56.4 31.1,56.4 34.8,60.1 34.8,63.807 46.977,75.984 J7.27
DAC_LDAC: J7.26 U11.15 | length 79.8
  L1 w0.25: U11.15 16.875,52.125 16.1,52.9 14.5,52.9 14.1,53.3 14.1,56.1 15.8,57.8 21.6,57.8 22.4,57 30.5,57 33.5,60 33.5,67.2 44.824,78.524 J7.26
DAC_OUT1: C43.2 R24.1 U11.1 U12.1 | length 18.1
  L1 w0.25: R24.1 8.5,32.5 9.5,33.5 9.5,36.5 12.905,39.905 U12.1 15.675,42.585 C43.2 16.225,43.135 U11.1
DAC_OUT1_I: C43.1 U11.3 U12.2 | length 7.7
  L1 w0.25: U12.2 16.635,38.635 16.91,38.91 C43.1 17.525,43.615 U11.3
DAC_OUT2: C44.2 R29.1 U11.8 U12.7 | length 20.5
  L1 w0.25: U11.8 20.775,43.865 C44.2 19.91,39.09 20.365,38.635 U12.7 23.365,38.635 26,36 26,34 28.5,31.5 R29.1
DAC_OUT2_I: C44.1 U11.6 U12.6 | length 9.5
  L1 w0.25: U11.6 19.371,44.946 19.371,43.281 C44.1 19.09,38.41 20.135,37.365 U12.6
DAC_SDI: J7.28 U11.9 | length 62.2
  L1 w0.25: U11.9 20.775,51.875 21.8,52.9 23.4,52.9 24.4,53.9 24.4,55 25.2,55.8 31.421,55.8 49.021,73.4 72.416,73.4 J7.28
GND: C2.1 C4.1 C6.1 C8.1 C9.2 C10.2 C11.2 C12.2 C13.2 C14.2 C15.2 C16.2 C17.2 C18.2 C19.2 C20.2 C21.2 C22.2 C23.2 C24.2 C25.2 C26.2 C27.2 C28.2 C29.1 C30.1 C31.2 C32.2 C33.2 C34.2 C35.2 C36.2 C37.2 C38.2 C39.1 C40.1 C41.1 C42.2 C45.2 C46.2 C47.2 C48.2 C49.1 C50.1 C51.1 C52.1 C53.1 C54.1 C55.1 C56.1 J1.MH J2.MH J3.MH J4.MH J5.MH J6.MH J7.6 J7.7 J7.44 pad.0 R4.1 R9.1 R14.1 R19.1 R33.2 U1.3 U1.5 U3.3 U3.5 U5.3 U5.5 U6.3 U6.5 U7.4 U7.5 U8.4 U8.5 U9.4 U9.5 U10.4 U10.5 U11.4 U11.5 U11.12 U12.3 U12.5 U13.1 U14.2 U14.4 U15.2 U15.4 | length 3.4
  L1 w0.25: U11.12 18.825,52.915 C42.2 ; v2(22.8,26.1) 23.575,26.1 23.63,26.045 23.865,26.045 C17.2
  other v2: 14.1,19.9 14.1,26.9 11.6,34.8 35.1,57.2 56,57.2 42.127,58.873
NetC1_1: C1.1 U1.1 VR1.2 VR1.3 | length 11.4
  L1 w0.25: VR1.3@43,27.5 VR1.2 44.5,25 45.775,23.725 47,23.725 C1.1 47.41,25.59 48.095,24.905 U1.1
NetC1_2: C1.2 R1.1 R4.2 U2.3 | length 19.1
  L1 w0.25: U2.3 40.635,37.365 44,34 46.5,34 48.225,32.275 R4.2 ; C1.2 47,28 48.225,29.225 R4.2 ; R1.1 R4.2
NetC3_1: C3.1 U1.7 VR2.2 VR2.3 | length 11.1
  L1 w0.25: U1.7 56.91,23.635 57,23.725 ; C3.1 57,23.725 ; VR2.3@61,27.5 VR2.2 59.5,25 58.225,23.725 57,23.725
NetC3_2: C3.2 R6.1 R9.2 U2.5 | length 20.4
  L1 w0.25: U2.5 51.905,36.095 55.775,32.225 R9.2 ; R6.1 R9.2 ; C3.2 57,28 55.775,29.225 R9.2
NetC5_1: C5.1 U3.1 VR3.2 VR3.3 | length 11.4
  L1 w0.25: VR3.3@69,27.5 VR3.2 70.5,25 71.775,23.725 73,23.725 C5.1 73.41,25.59 74.095,24.905 U3.1
NetC5_2: C5.2 R11.1 R14.2 U4.3 | length 26.1
  L1 w0.25: U4.3 59.135,37.365 62.5,34 72.5,34 74.225,32.275 R14.2 ; C5.2 73,28.5 74.225,29.725 R14.2 ; R11.1 R14.2
NetC7_1: C7.1 U3.7 VR4.2 VR4.3 | length 11.1
  L1 w0.25: U3.7 82.91,23.635 83,23.725 ; C7.1 83,23.725 ; VR4.3@87,27.5 VR4.2 85.5,25 84.225,23.725 83,23.725
NetC7_2: C7.2 R16.1 R19.2 U4.5 | length 27.7
  L1 w0.25: U4.5 78.405,36.095 81.775,32.725 R19.2 ; R16.1 R19.2 ; C7.2 83,28 81.775,29.225 R19.2
NetC52_2: C52.2 R33.1 U15.5 | length 10.1
  L1 w1.5: C52.2 83.625,64.8 U15.5 93.475,64.8 R33.1
NetC55_2: C55.2 R21.1 R22.1 R24.2 U5.2 | length 10.3
  L1 w0.25: C55.2 6.127,28.973 7.429,30.275 R24.2 R21.1 R22.1 13.775,30.275 14.135,30.635 U5.2
NetC56_2: C56.2 R26.1 R27.1 R29.2 U5.6 | length 9.5
  L1 w0.25: U5.6 22.635,29.365 23.225,28.775 R27.1 R26.1 R29.2 28.5,27.9 29.3,27.1 C56.2
NetR2_1: R2.1 U1.2 VR1.1 | length 8.4
  L1 w0.25: VR1.1@43,22.5 43.225,22.275 47,22.275 ; R2.1 47,22.275 ; U1.2 48.635,23.635 47.275,22.275 47,22.275
NetR3_1: R3.1 U2.1 U2.2 | length 4.9
  L1 w0.25: U2.2 U2.1 R3.1@39.175,43.55
NetR7_1: R7.1 U1.6 VR2.1 | length 7.9
  L1 w0.25: U1.6 56.91,22.365 57,22.275 ; R7.1 57,22.275 ; VR2.1@61,22.5 60.775,22.275 57,22.275
NetR8_1: R8.1 U2.6 U2.7 | length 9.5
  L1 w0.25: U2.6 U2.7 43.365,38.635 43,39 43,41.275 45.275,43.55 R8.1
NetR12_1: R12.1 U3.2 VR3.1 | length 8.4
  L1 w0.25: VR3.1@69,22.5 69.225,22.275 73,22.275 ; R12.1 73,22.275 ; U3.2 74.36,23.635 73,22.275
NetR13_1: R13.1 U4.1 U4.2 | length 5.7
  L1 w0.25: U4.2 U4.1 58.175,41.175 60,43 R13.1
NetR17_1: R17.1 U3.6 VR4.1 | length 8.1
  L1 w0.25: U3.6 82.91,22.365 83,22.275 ; R17.1 83,22.275 ; VR4.1@87,22.5 86.775,22.275 83,22.275
NetR18_1: R18.1 U4.6 U4.7 | length 11.6
  L1 w0.25: U4.6 U4.7 62.365,38.635 62,39 62,41.5 63.5,43 66.45,43 R18.1
NetR22_2: R22.2 R25.1 U5.1 | length 18.3
  L1 w0.25: R25.1 10.5,25 11.5,26 16.5,26 18,27.5 18,31 17.095,31.905 U5.1 14.405,31.905 14.225,31.725 R22.2
NetR23_1: R23.1 R25.2 U6.2 | length 5.3
  L1 w0.25: R25.2 R23.1 13.775,23.275 14.135,23.635 U6.2
NetR27_2: R27.2 R30.1 U5.7 | length 18.5
  L1 w0.25: R27.2 23.275,30.225 22.865,30.635 U5.7 19.635,30.635 19,30 19,28 20,27 24.5,27 26.5,25 R30.1
NetR28_1: R28.1 R30.2 U6.6 | length 5.4
  L1 w0.25: U6.6 22.635,22.365 23.225,21.775 R28.1 R30.2
NetR31_2: R31.2 U11.10 | length 4
  L1 w0.25: U11.10 20.125,52.625 21.275,53.775 R31.2
NetR32_2: R32.2 U11.14 | length 4.1
  L1 w0.25: R32.2 16.225,53.775 17.525,52.475 U11.14
STICK_OUT1: J5.1 R23.2 U6.1 | length 22.1
  L1 w0.25: R23.2 13.725,24.725 13.905,24.905 U6.1 17.595,24.905 18,24.5 18,20.5 16,18.5 J5.1
STICK_OUT2: J6.1 R28.2 U6.7 | length 26.4
  L1 w0.25: R28.2 23.275,23.225 22.865,23.635 U6.7 19.635,23.635 19,23 19,20.5 21,18.5 25,18.5 29,14.5 J6.1
pads on no net: J7.1 J7.3 J7.8 J7.9 J7.10 J7.11 J7.12 J7.13 J7.14 J7.15 J7.16 J7.17 J7.18 J7.19 J7.20 J7.21 J7.22 J7.23 J7.24 J7.35 J7.36 J7.37 J7.38 J7.39 J7.40 J7.41 J7.42 J7.43 J7.45 J7.46 J7.47 J7.48 J7.49 J7.52 J7.53 J7.54 J7.55 J7.56 J7.57 J7.58
copper on no net:
  other v2: 20.5,55 62.9,58.5

## Polygon pours and split planes (outlines as drawn)
GND on L1 "GND_L01_P012" (solid, pour order 12): 2,88 98,88 98,2 2,2
GND on L4 "GND_L04_P014" (solid, pour order 14): 2,88 98,88 98,2 2,2
+5V on L3 (PWR) "+5V_L03_P010" (solid, pour order 10): 2,88 98,88 98,2 2,2
-5V on L3 (PWR) "-5V_L03_P008" (solid, pour order 8): 85,72 95,72 95,15 30,15 30,34 10.5,34 10.5,38 52,38 52,23 56,23 56,38 78,38 78,22 85,22
+2V5 on L3 (PWR) "+2V5_L03_P004" (solid, pour order 4): 70,53.5 70,44.083 14,44.083 14,53.5
+3V3 on L3 (PWR) "+3V3_L03_P002" (solid, pour order 2): 20,85 20,67 25,67 25,53.5 70,53.5 70,85
GND on L2 (GND) (split plane): 99.49,0.51 0.51,0.51 0.51,89.49 99.49,89.49

## Keep-outs
Keep-Out Layer:
  the board outline again, w0.2

## Silkscreen, mask and mechanical layers (free items; w line width, h text height)
Top Overlay:
  region: 13,14 10,14 10,17 13,17
  region: 26,14 19,14 19,17 26,17
  region: 35,14 32,14 32,17 35,17
  region: 81,14 74,14 74,17 81,17
  region: 68,14 61,14 61,17 68,17
  region: 55,14 48,14 48,17 55,17
  region: 90,14 87,14 87,17 90,17
  region: 42,14 39,14 39,17 42,17
  lines w0.2: 10,14 10,4 35,4 35,14 ; 33.5,72.5 68,72.5 ; 39,4 39,14 90,14 90,4 39,4
  text "SDRdrum" at 33.5,77.5 h5
  text "For the Arty FPGA board" at 33.5,73.5 h2
  text "Rev B" at 33.5,70 h1.5
  text "18-Jul-2019" at 43,70 h1.5
  text "OUT1" at 13,14 h1.7
  text "OUT2" at 26,14 h1.7
  text "IN1" at 42,14 h1.7
  text "IN2" at 55,14 h1.7
  text "IN3" at 68,14 h1.7
  text "IN4" at 81,14 h1.7
Mechanical 1:
  the board outline again, w0.2